# EAGLE board panelDoc (EAGLE 6.4)
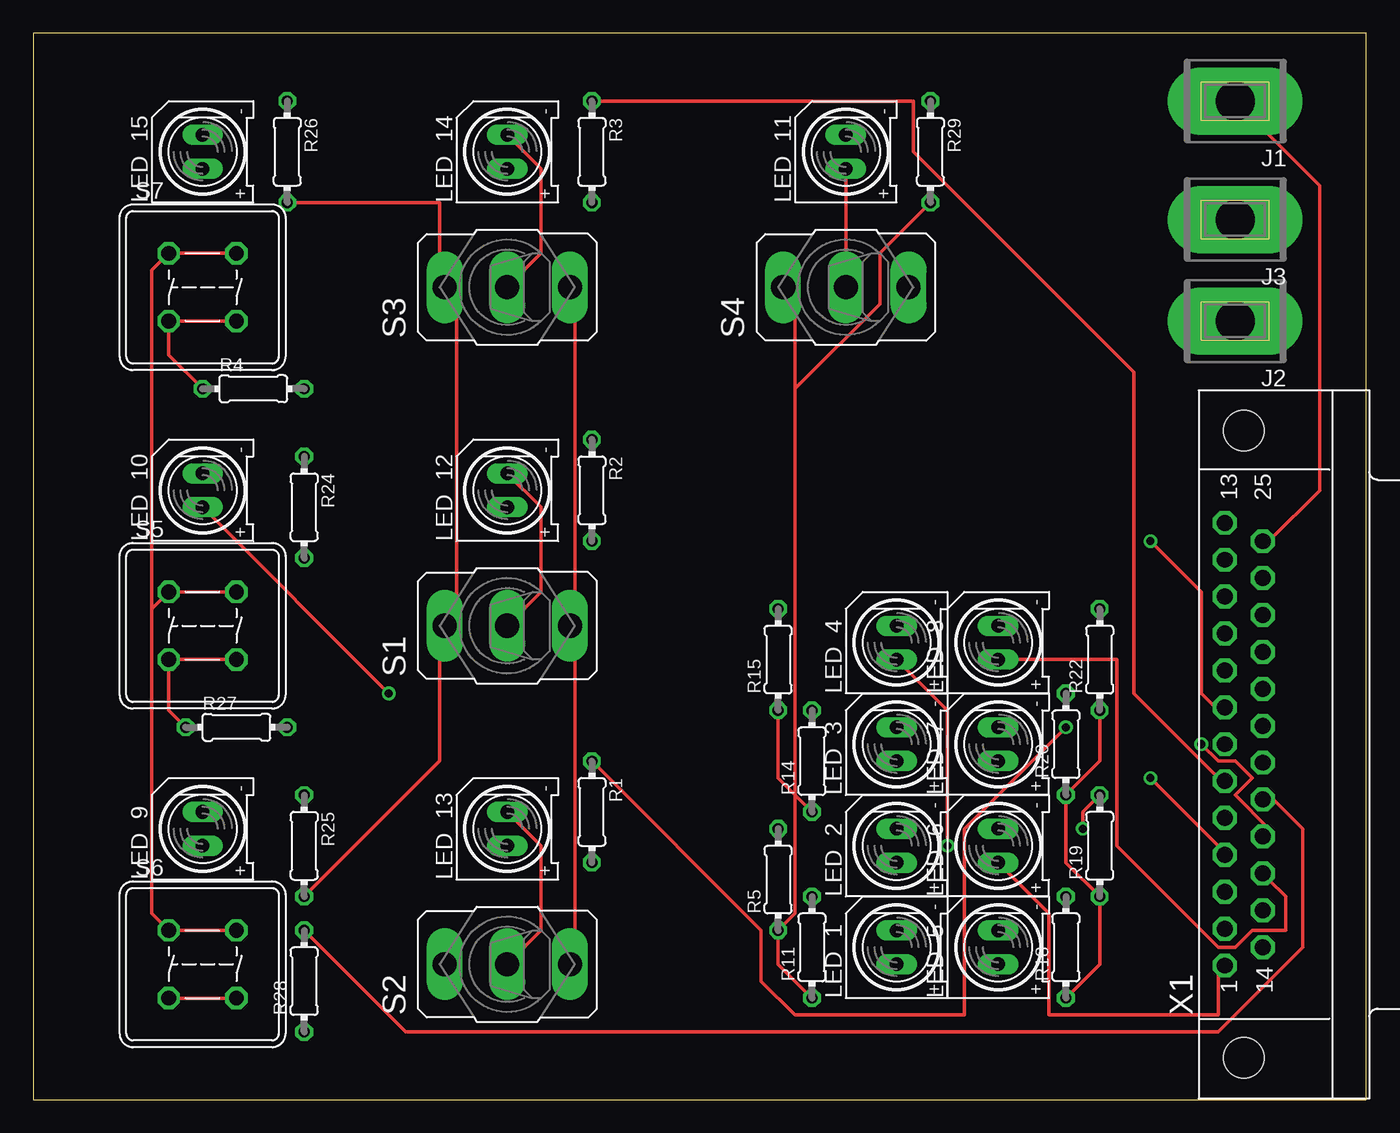
[diagram p0: board, top side]
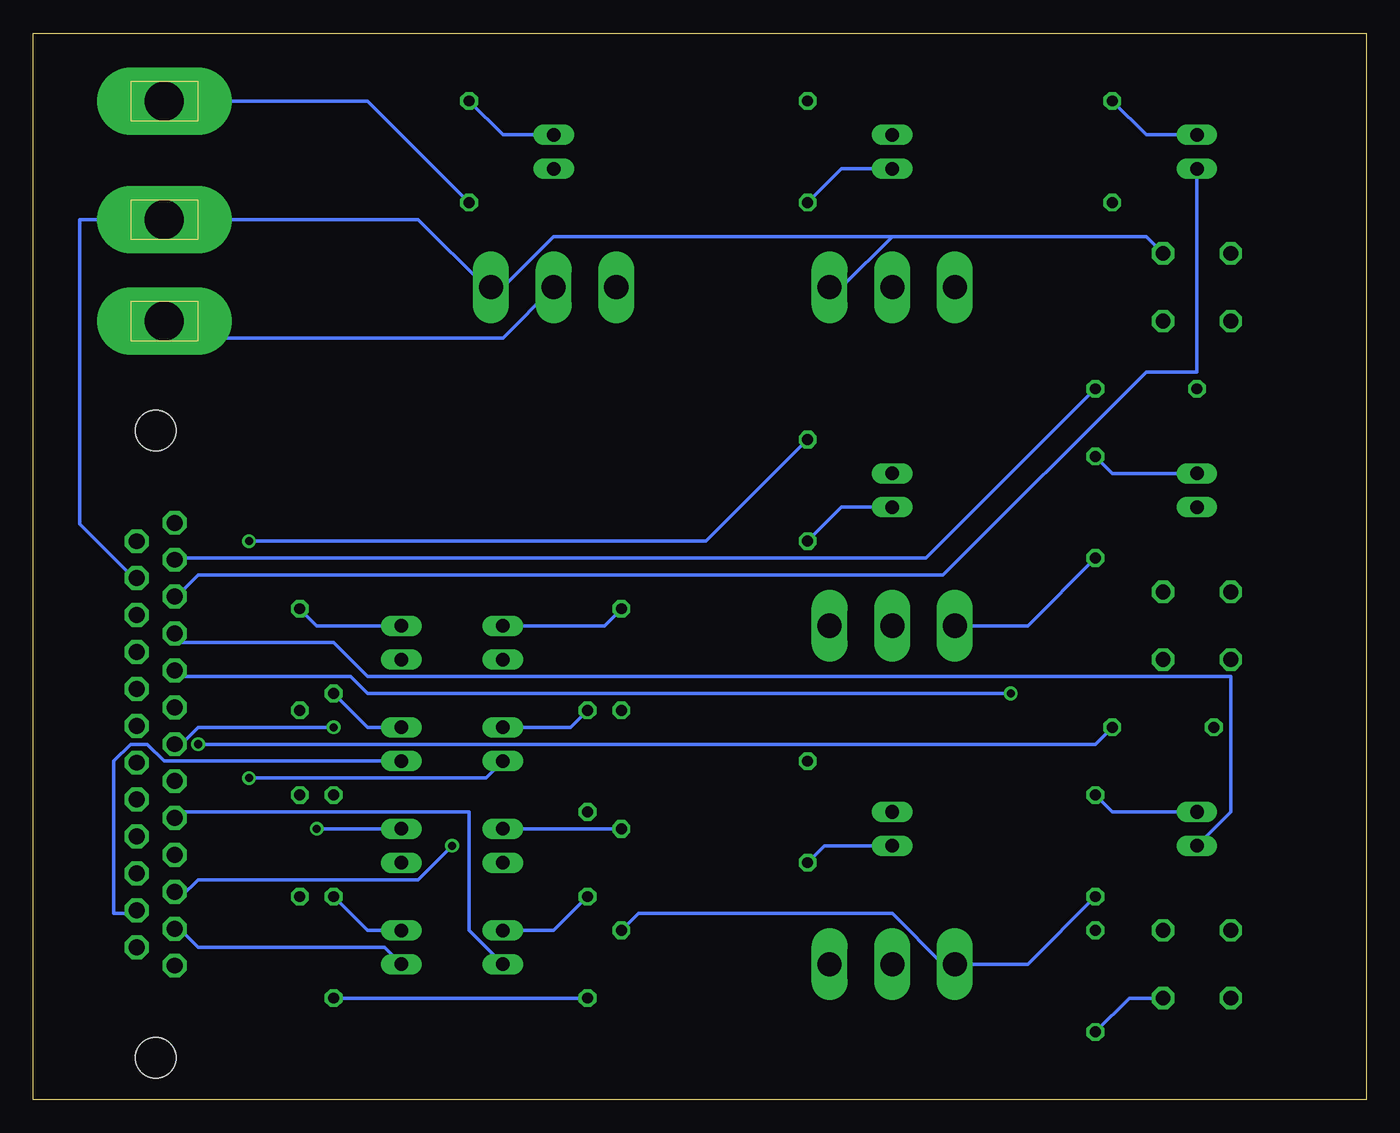
[diagram p1: board, bottom side, seen from below]

Size 100 x 80 mm. Coordinates in mm from the lower left corner, seen from the top.
Outline: 0,0 100,0 100,80 0,80 0,0
Copper layers (1*16): Top 0.035mm / dielectric 1.5mm / Bottom 0.035mm
Design rules "default": minimum track width 10mil, minimum drill 24mil, track to track 8mil, track to pad 8mil, pad to pad 8mil, via to via 8mil, smd to smd 8mil, copper to edge 40mil, drill to drill 8mil, minimum pad ring 10mil, minimum via ring 8mil, stop-mask expansion 4mil, vias tented up to drill 0mil, thermal gap 10mil

## Footprints (pad centres in the part's own frame; a part is rotated, then mirrored left to right if it is on the bottom)
62221 = drill 2.921 pad 5.08 long: 1 0,0
Q62902-B156 = drill 1.016 long: A -1.27,0; K 1.27,0
0204/7 = drill 0.813 octagon: 1 -3.81,0; 2 3.81,0
M9040P = drill 1.803 long: 1 0,4.699; 2 0,0; 3 0,-4.699
DTE6K = drill 1.118 octagon: 1 -2.54,2.54; 2 2.54,2.54; 3 2.54,-2.54; 4 -2.54,-2.54
182-025-MALE = drill 1.194 pad 1.524 octagon: 1 -16.612,10.923; 2 -13.843,10.923; 3 -11.074,10.923; 4 -8.306,10.923; 5 -5.537,10.923; 6 -2.769,10.923; 7 0,10.923; 8 2.769,10.923; 9 5.537,10.923; 10 8.306,10.923; 11 11.074,10.923; 12 13.843,10.923; 13 16.612,10.923; 14 -15.227,8.08; 15 -12.459,8.08; 16 -9.69,8.08; 17 -6.921,8.08; 18 -4.153,8.08; 19 -1.384,8.08; 20 1.384,8.08; 21 4.153,8.08; 22 6.921,8.08; 23 9.69,8.08; 24 12.459,8.08; 25 15.227,8.08 | hole 3.048: -23.52,9.501; 23.52,9.501

## Placement (x,y rotation side)
J1  PIN1-2  [62221]  90.17,74.93 180 top
J2  PIN1-2  [62221]  90.17,58.42 180 top
J3  PIN1-2  [62221]  90.17,66.04 180 top
LED_1  [Q62902-B156]  64.77,11.43 90 top
LED_2  [Q62902-B156]  64.77,19.05 90 top
LED_3  [Q62902-B156]  64.77,26.67 90 top
LED_4  [Q62902-B156]  64.77,34.29 90 top
LED_5  [Q62902-B156]  72.39,11.43 90 top
LED_6  [Q62902-B156]  72.39,19.05 90 top
LED_7  [Q62902-B156]  72.39,26.67 90 top
LED_8  [Q62902-B156]  72.39,34.29 90 top
LED_9  Stop LED  [Q62902-B156]  12.7,20.32 90 top
LED_10  Cruise LED  [Q62902-B156]  12.7,45.72 90 top
LED_11  On LED  [Q62902-B156]  60.96,71.12 90 top
LED_12  Motor LED  [Q62902-B156]  35.56,45.72 90 top
LED_13  Brake LED  [Q62902-B156]  35.56,20.32 90 top
LED_14  Steer LED  [Q62902-B156]  35.56,71.12 90 top
LED_15  Reverse LED  [Q62902-B156]  12.7,71.12 90 top
R1  200  [0204/7]  41.91,21.59 270 top
R2  200  [0204/7]  41.91,45.72 270 top
R3  200  [0204/7]  41.91,71.12 270 top
R4  220  [0204/7]  16.51,53.34 0 top
R5  1K  [0204/7]  55.88,16.51 90 top
R11  1K  [0204/7]  58.42,11.43 90 top
R14  1K  [0204/7]  58.42,25.4 90 top
R15  1K  [0204/7]  55.88,33.02 90 top
R18  1K  [0204/7]  77.47,11.43 90 top
R19  1K  [0204/7]  80.01,19.05 90 top
R20  1K  [0204/7]  77.47,26.67 90 top
R22  1K  [0204/7]  80.01,33.02 90 top
R24  1K  [0204/7]  20.32,44.45 270 top
R25  1K  [0204/7]  20.32,19.05 270 top
R26  1K  [0204/7]  19.05,71.12 270 top
R27  220  [0204/7]  15.24,27.94 0 top
R28  220  [0204/7]  20.32,8.89 90 top
R29  10K  [0204/7]  67.31,71.12 270 top
S1  Motor  [M9040P]  35.56,35.56 90 top
S2  Brake  [M9040P]  35.56,10.16 90 top
S3  Steer  [M9040P]  35.56,60.96 90 top
S4  On  [M9040P]  60.96,60.96 90 top
S5  Cruise Switch  [DTE6K]  12.7,35.56 0 top
S6  Stop switch  [DTE6K]  12.7,10.16 0 top
S7  Reverse Switch  [DTE6K]  12.7,60.96 0 top
X1  [182-025-MALE]  100.33,26.67 90 top

## Library data of the parts
J1-J3 = con-faston; MF: TYCO ELECTRONICS; MPN: 62221-1; OC_FARNELL: unknown; OC_NEWARK: 16H2318
LED_1-LED_15 = led
R1-R5 R11 R14 R15 R18-R20 R22 R24-R29 = resistor
S1-S4 = switch
S5-S7 = switch-misc
X1 = con-subd; OC_FARNELL: unknown; OC_NEWARK: unknown

## Nets
+5V: J3.1 S1.3 S2.3 S3.3 S4.3 S5.1 S5.2 S6.1 S6.2 S7.1 S7.2 X1.24
GND: J1.1 R5.1 R11.1 R14.1 R15.1 R18.1 R19.1 R20.1 R22.1 R24.2 R25.2 R26.2 R29.2 S1.1 S2.1 S3.1 S4.1 X1.25
N$1: R3.1 X1.6
N$2: LED_8.K R22.2
N$3: LED_10.K R24.1
N$4: LED_3.K R14.2
N$5: LED_3.A X1.4
N$6: LED_4.K R15.2
N$7: LED_4.A X1.3
N$8: LED_1.A X1.5
N$9: LED_8.A X1.16
N$10: LED_5.K R18.2
N$11: LED_5.A X1.2
N$12: LED_6.K R19.2
N$13: LED_6.A X1.1
N$14: LED_7.K R20.2
N$15: LED_10.A X1.9
N$16: LED_1.K R11.2
N$17: J2.1 LED_11.A S4.2
N$18: LED_11.K R29.1
N$19: R27.2 X1.17
N$20: LED_7.A X1.15
N$21: LED_12.A R2.2
N$22: LED_15.A X1.11
N$23: LED_12.K S1.2
N$24: LED_13.K S2.2
N$25: LED_9.K R25.1
N$26: LED_9.A X1.10
N$27: LED_14.A R3.2
N$28: R2.1 X1.8
N$29: LED_13.A R1.2
N$30: LED_14.K S3.2
N$31: R4.2 X1.12
N$32: R1.1 X1.7
N$33: R4.1 S7.3 S7.4
N$34: R27.1 S5.3 S5.4
N$35: R28.2 X1.18
N$37: R28.1 S6.3 S6.4
N$38: LED_2.K R5.2
N$39: X1.19
REVERSE: LED_15.K R26.1

## Tracks (layer width: path | path; a pad name or v marks a point on that pad's centre or on a via)
+5V
  Top 0.254: S7.2 S7.1 8.89,62.23 8.89,36.83 | S6.2 S6.1 8.89,13.97 8.89,36.83 | S5.2 S5.1 8.89,36.83 | 40.64,35.56 40.64,10.16 S2.3 | 40.64,35.56 40.64,60.96 S3.3 | 40.64,35.56 S1.3
  Bottom 0.254: X1.24 92.71,39.37 96.52,43.18 96.52,66.04 J3.1 71.12,66.04 66.04,60.96 S4.3 64.77,60.96 60.96,64.77 35.56,64.77 | S7.2 16.51,64.77 35.56,64.77 | 35.56,64.77 39.37,60.96 S3.3
GND
  Top 0.254: R26.2 30.48,67.31 30.48,60.96 S3.1 31.75,60.96 31.75,35.56 S1.1 30.48,35.56 30.48,25.4 R25.2 | J1.1 96.52,68.58 96.52,45.72 92.71,41.91 X1.25 | R22.1 80.01,25.4 R20.1 77.47,17.78 R19.1 80.01,10.16 R18.1 | R11.1 55.88,10.16 R5.1 57.15,13.97 57.15,22.86 | 57.15,22.86 55.88,24.13 R15.1 | 57.15,22.86 R14.1 | 57.15,22.86 57.15,53.34 | 57.15,53.34 57.15,60.96 S4.1 | R29.2 63.5,63.5 63.5,59.69 57.15,53.34
  Bottom 0.254: R25.2 25.4,10.16 S2.1 31.75,10.16 35.56,13.97 54.61,13.97 R5.1 | R24.2 25.4,35.56 S1.1 | R29.2 74.93,74.93 J1.1 | R11.1 R18.1
N$1
  Top 0.254: R3.1 66.04,74.93 66.04,71.12 82.55,54.61 82.55,30.48 88.9,24.13 X1.6
N$2
  Bottom 0.254: R22.2 78.74,35.56 LED_8.K
N$3
  Bottom 0.254: R24.1 19.05,46.99 LED_10.K
N$4
  Bottom 0.254: R14.2 59.69,27.94 LED_3.K
N$5  (via drill 0.61)
  Top 0.254: v83.82,24.13 88.9,19.05 X1.4
  Bottom 0.254: LED_3.A 66.04,24.13 v83.82,24.13
N$6
  Bottom 0.254: R15.2 57.15,35.56 LED_4.K
N$7  (via drill 0.61)
  Top 0.254: LED_4.A 68.58,29.21 v68.58,19.05
  Bottom 0.254: v68.58,19.05 71.12,16.51 87.63,16.51 88.9,15.24 X1.3
N$8
  Bottom 0.254: LED_1.A 67.31,12.7 67.31,21.59 88.9,21.59 X1.5
N$9
  Top 0.254: LED_8.A 81.28,33.02 81.28,19.05 88.9,11.43 90.17,11.43 91.44,12.7 93.98,12.7 93.98,15.24 92.71,16.51 X1.16
N$10
  Bottom 0.254: R18.2 74.93,12.7 LED_5.K
N$11
  Bottom 0.254: LED_5.A 73.66,11.43 87.63,11.43 88.9,12.7 X1.2
N$12  (via drill 0.61)
  Top 0.254: R19.2 78.74,21.59 v78.74,20.32
  Bottom 0.254: LED_6.K v78.74,20.32
N$13
  Top 0.254: LED_6.A 76.2,13.97 76.2,6.35 88.9,6.35 88.9,10.16 X1.1
N$14
  Bottom 0.254: R20.2 74.93,27.94 LED_7.K
N$15  (via drill 0.61)
  Top 0.254: v26.67,30.48 LED_10.A
  Bottom 0.254: v26.67,30.48 74.93,30.48 76.2,31.75 88.9,31.75 X1.9
N$16
  Bottom 0.254: R11.2 60.96,12.7 LED_1.K
N$17
  Top 0.254: S4.2 LED_11.A
  Bottom 0.254: S4.2 64.77,57.15 88.9,57.15 J2.1
N$18
  Bottom 0.254: R29.1 64.77,72.39 LED_11.K
N$19  (via drill 0.61)
  Top 0.254: v87.63,26.67 88.9,25.4 90.17,25.4 91.44,24.13 90.17,22.86 92.71,20.32 X1.17
  Bottom 0.254: R27.2 20.32,26.67 v87.63,26.67
N$20
  Bottom 0.254: LED_7.A 90.17,25.4 91.44,26.67 92.71,26.67 93.98,25.4 93.98,13.97 92.71,13.97 X1.15
N$21
  Bottom 0.254: R2.2 39.37,44.45 LED_12.A
N$22
  Bottom 0.254: LED_15.A 12.7,54.61 16.51,54.61 31.75,39.37 87.63,39.37 88.9,38.1 X1.11
N$23
  Top 0.254: LED_12.K 38.1,44.45 38.1,38.1 S1.2
N$24
  Top 0.254: LED_13.K 38.1,19.05 38.1,12.7 S2.2
N$25
  Bottom 0.254: R25.1 19.05,21.59 LED_9.K
N$26
  Bottom 0.254: LED_9.A 10.16,21.59 10.16,31.75 74.93,31.75 77.47,34.29 88.9,34.29 X1.10
N$27
  Bottom 0.254: R3.2 39.37,69.85 LED_14.A
N$28  (via drill 0.61)
  Top 0.254: v83.82,41.91 87.63,38.1 87.63,30.48 88.9,29.21 X1.8
  Bottom 0.254: R2.1 49.53,41.91 v83.82,41.91
N$29
  Bottom 0.254: R1.2 40.64,19.05 LED_13.A
N$30
  Top 0.254: LED_14.K 38.1,69.85 38.1,63.5 S3.2
N$31
  Bottom 0.254: R4.2 33.02,40.64 88.9,40.64 X1.12
N$32  (via drill 0.61)
  Top 0.254: R1.1 54.61,12.7 54.61,8.89 57.15,6.35 69.85,6.35 69.85,20.32 v77.47,27.94
  Bottom 0.254: v77.47,27.94 87.63,27.94 88.9,26.67 X1.7
N$33
  Top 0.254: R4.1 10.16,55.88 S7.4 S7.3
N$34
  Top 0.254: R27.1 10.16,29.21 S5.4 S5.3
N$35
  Top 0.254: R28.2 27.94,5.08 88.9,5.08 95.25,11.43 95.25,20.32 92.71,22.86 X1.18
N$37
  Top 0.254: S6.3 S6.4
  Bottom 0.254: R28.1 17.78,7.62 S6.3
N$38
  Bottom 0.254: LED_2.K R5.2
REVERSE
  Bottom 0.254: R26.1 16.51,72.39 LED_15.K